# EAGLE board pulser (EAGLE 9.5.1)
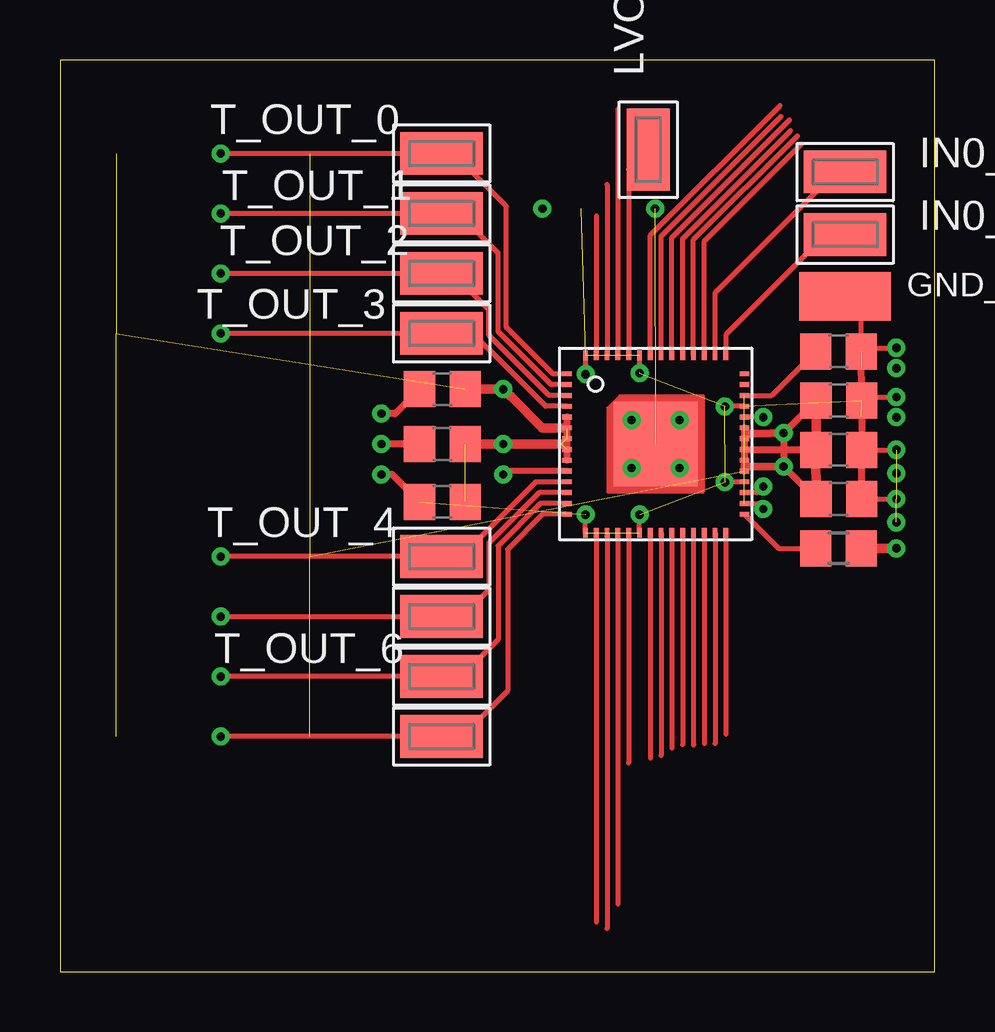
[diagram p0: board, top side]
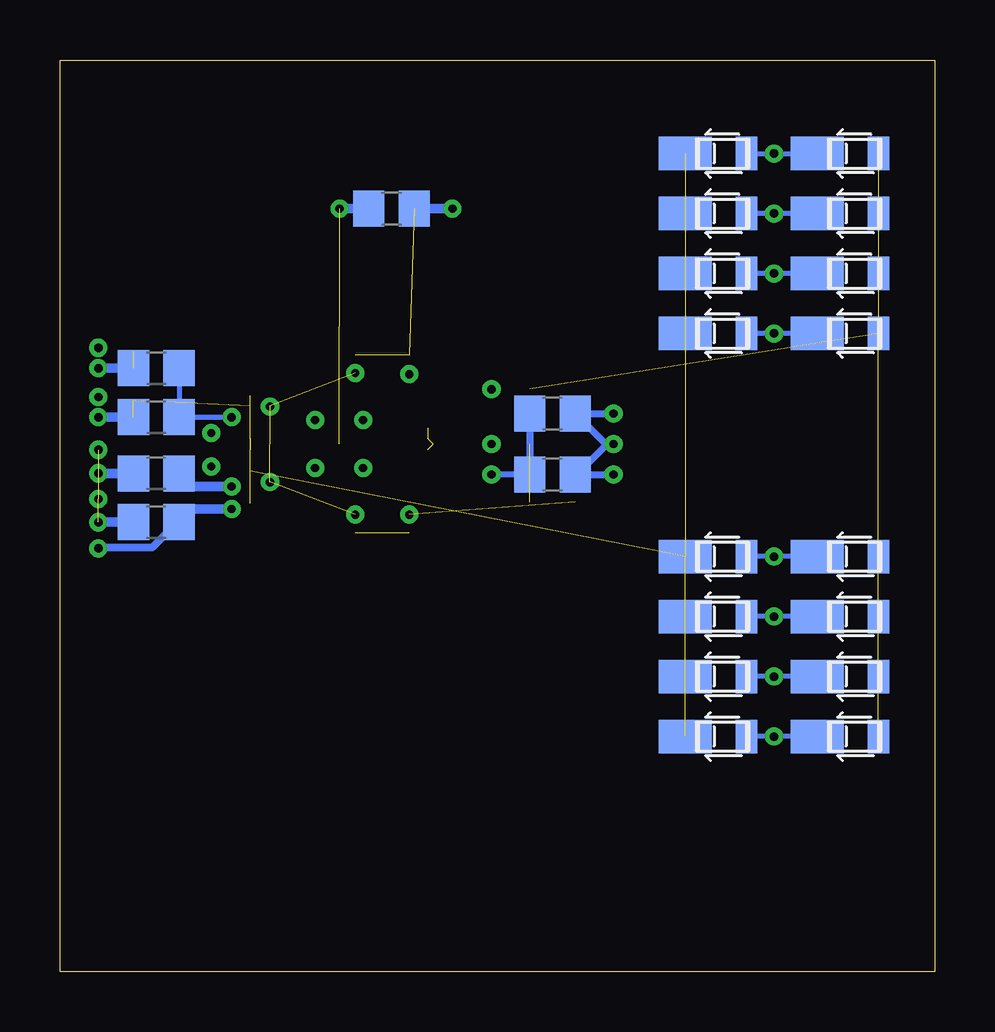
[diagram p1: board, bottom side, seen from below]

Size 36.45 x 38 mm. Coordinates in mm from the lower left corner, seen from the top.
Outline: 0,0 36.45,0 36.45,38 0,38 0,0
Copper layers (1*16): Top 0.035mm / dielectric 0.15mm / Bottom 0.035mm
Design rules "default": minimum track width 6mil, minimum drill 0.35mm, track to track 6mil, track to pad 6mil, pad to pad 6mil, via to via 6mil, smd to smd 6mil, copper to edge 40mil, drill to drill 6mil, minimum pad ring 10mil, minimum via ring 8mil, stop-mask expansion 4mil, vias tented up to drill 0mil, thermal gap 10mil
Net classes: 1 power_cw: width 0.2 mm; 2 power: width 0.3 mm

## Footprints (pad centres in the part's own frame; a part is rotated, then mirrored left to right if it is on the bottom)
C0805 = smd 1.3 x 1.5: 1 -0.95,0; 2 0.95,0
POWERDI-123 = smd 0.9 x 1.4: A -1.6,0 | smd 2.2 x 1.4: C 0.95,0
TP380X203 = smd 3.8 x 2.03: 1 0,0
KEYSTONE_5015 = smd 3.43 x 1.78: 1 0,0
R0805 = smd 1.3 x 1.5: 1 -0.95,0; 2 0.95,0
TFLGA-56LD = smd 0.4 x 0.2: AGND 3.7,-1.575; CK 3.7,2.925; CW 3.7,2.475; DGND 3.7,1.575; DVDD 3.7,2.025; HVM@1 -3.7,1.125; HVM@2 -3.7,0.675; HVM@3 -3.7,0.225; HVM@4 -3.7,-0.225; HVM@5 -3.7,-0.675; HVM_CW -3.7,-1.125; HVP@1 3.7,0.675; HVP@2 3.7,0.225; HVP@3 3.7,-0.225; HVP@4 3.7,-0.675; HVP@5 3.7,-1.125; HVP_CW 3.7,1.125; THSD 3.7,-2.925; VDDM 3.7,-2.025; VDDP 3.7,-2.475; XDCR_1 -3.7,2.925; XDCR_2 -3.7,2.475; XDCR_3 -3.7,2.025; XDCR_4 -3.7,1.575; XDCR_5 -3.7,-1.575; XDCR_6 -3.7,-2.025; XDCR_7 -3.7,-2.475; XDCR_8 -3.7,-2.925 | smd 0.2 x 0.4: GND_PWR@1 -2.925,-3.7; GND_PWR@2 -0.675,-3.7; GND_PWR@3 -0.675,3.7; GND_PWR@4 -2.925,3.7; IN1_0 2.925,3.7; IN1_1 2.475,3.7; IN2_0 2.025,3.7; IN2_1 1.575,3.7; IN3_0 1.125,3.7; IN3_1 0.675,3.7; IN4_0 0.225,3.7; IN4_1 -0.225,3.7; IN5_0 -0.225,-3.7; IN5_1 0.225,-3.7; IN6_0 0.675,-3.7; IN6_1 1.125,-3.7; IN7_0 1.575,-3.7; IN7_1 2.025,-3.7; IN8_0 2.475,-3.7; IN8_1 2.925,-3.7; LVOUT_1 -1.125,3.7; LVOUT_2 -1.575,3.7; LVOUT_3 -2.025,3.7; LVOUT_4 -2.475,3.7; LVOUT_5 -2.475,-3.7; LVOUT_6 -2.025,-3.7; LVOUT_7 -1.575,-3.7; LVOUT_8 -1.125,-3.7 | smd 3.5 x 3.5: SUB 0,0

## Placement (x,y rotation side)
C170  220n 100V  [C0805]  22.64,31.8 0 bottom
C172  220n 100V  [C0805]  32.45,23.8 180 top
C174  220n 100V  [C0805]  32.45,21.75 180 top
C175  220n 100V  [C0805]  32.45,19.7 180 top
C177  220n 100V  [C0805]  32.44,23.11 0 bottom
C178  220n 100V  [C0805]  32.44,25.15 0 bottom
C180  220n 100V  [C0805]  32.44,18.73 180 bottom
C181  220n 100V  [C0805]  32.44,20.77 180 bottom
C182  220n 100V  [C0805]  32.44,25.85 0 top
C183  220n 100V  [C0805]  15.93,24.28 180 top
C184  220n 100V  [C0805]  15.93,21.99 180 top
C185  220n 100V  [C0805]  15.93,19.58 180 top
C190  220n 100V  [C0805]  15.93,20.72 180 bottom
C191  220n 100V  [C0805]  15.93,23.26 180 bottom
D0_0  [POWERDI-123]  9.45,34.1 180 bottom
D0_1  [POWERDI-123]  3.95,34.1 180 bottom
D1_0  [POWERDI-123]  9.45,31.6 180 bottom
D1_1  [POWERDI-123]  3.95,31.6 180 bottom
D2_0  [POWERDI-123]  9.45,29.1 180 bottom
D2_1  [POWERDI-123]  3.95,29.1 180 bottom
D3_0  [POWERDI-123]  9.45,26.6 180 bottom
D3_1  [POWERDI-123]  3.95,26.6 180 bottom
D4_0  [POWERDI-123]  9.45,17.3 180 bottom
D4_1  [POWERDI-123]  3.95,17.3 180 bottom
D5_0  [POWERDI-123]  9.45,14.8 180 bottom
D5_1  [POWERDI-123]  3.95,14.8 180 bottom
D6_0  [POWERDI-123]  9.45,12.3 180 bottom
D6_1  [POWERDI-123]  3.95,12.3 180 bottom
D7_0  [POWERDI-123]  9.45,9.8 180 bottom
D7_1  [POWERDI-123]  3.95,9.8 180 bottom
GND_1  5019  [TP380X203]  32.71,28.15 0 top
IN0_0  5015  [KEYSTONE_5015]  32.71,30.72 0 top
IN0_1  5015  [KEYSTONE_5015]  32.71,33.33 0 top
LVOUT0  5015  [KEYSTONE_5015]  24.51,34.26 90 top
R2  10k  [R0805]  32.44,17.64 0 top
STHV_0  STHV800  [TFLGA-56LD]  24.82,21.99 0 top
T_OUT_0  5015  [KEYSTONE_5015]  15.9,34.1 0 top
T_OUT_1  5015  [KEYSTONE_5015]  15.9,31.6 0 top
T_OUT_2  5015  [KEYSTONE_5015]  15.9,29.1 0 top
T_OUT_3  5015  [KEYSTONE_5015]  15.9,26.6 0 top
T_OUT_4  5015  [KEYSTONE_5015]  15.9,17.3 0 top
T_OUT_5  5015  [KEYSTONE_5015]  15.9,14.8 0 top
T_OUT_6  5015  [KEYSTONE_5015]  15.9,12.3 0 top
T_OUT_7  5015  [KEYSTONE_5015]  15.9,9.8 0 top

## Library data of the parts
C170 C172 C174 C175 C177 C178 C180-C185 C190 C191 = rcl; SPICEPREFIX: C
D0_0 D0_1 D1_0 D1_1 D2_0 D2_1 D3_0 D3_1 D4_0 D4_1 D5_0 D5_1 D6_0 D6_1 D7_0 D7_1 = dfls130l-7; MF: Diodes Inc; MOUSER: SBR1U200P1-7; MPN: SBR1U200P1
GND_1 = 5019; AVAILABILITY: Good; DESCRIPTION: Phosphor Bronze Contact Miniature Silver Plated Surface Mount Test Points; MF: Keystone; MP: 5019; PACKAGE: 2010 Keystone; PRICE: 0.18 USD
IN0_0 IN0_1 LVOUT0 T_OUT_0 T_OUT_1-T_OUT_7 = keystone_5015; AVAILABILITY: Unavailable; DESCRIPTION: Test Point; Black; Surface Mount; Wire Leaded; Polycarbonate; 0.04 in.; MF: Keystone Electronics; MP: 5015; PACKAGE: Keystone Electronics; PRICE: None
R2 = rcl
STHV_0 = wouter

## Nets
CLK: STHV_0.CK
CW: STHV_0.CW
GND [power_cw]: C170.2 C172.1 C174.1 C175.1 C177.1 C178.1 C180.2 C181.2 C182.2 C183.2 C184.2 C185.2 C190.1 C191.1 GND_1.1 STHV_0.AGND STHV_0.DGND STHV_0.GND_PWR@1 STHV_0.GND_PWR@2 STHV_0.GND_PWR@3 STHV_0.GND_PWR@4
HVM [power]: C183.1 C184.1 C185.1 D0_1.A D1_1.A D2_1.A D3_1.A D4_1.A D5_1.A D6_1.A D7_1.A STHV_0.HVM@1 STHV_0.HVM@2 STHV_0.HVM@3 STHV_0.HVM@4 STHV_0.HVM@5
HVM_CW [power_cw]: C190.2 C191.2 STHV_0.HVM_CW
HVP [power]: C172.2 C174.2 C175.2 D0_0.C D1_0.C D2_0.C D3_0.C D4_0.C D5_0.C D6_0.C D7_0.C STHV_0.HVP@1 STHV_0.HVP@2 STHV_0.HVP@3 STHV_0.HVP@4 STHV_0.HVP@5
HVP_CW: C177.2 C178.2 STHV_0.HVP_CW
IN0_0: IN0_0.1 STHV_0.IN1_0
IN0_1: IN0_1.1 STHV_0.IN1_1
IN1_0: STHV_0.IN2_0
IN1_1: STHV_0.IN2_1
IN2_0: STHV_0.IN3_0
IN2_1: STHV_0.IN3_1
IN3_0: STHV_0.IN4_0
IN3_1: STHV_0.IN4_1
IN4_0: STHV_0.IN5_0
IN4_1: STHV_0.IN5_1
IN5_0: STHV_0.IN6_0
IN5_1: STHV_0.IN6_1
IN6_0: STHV_0.IN7_0
IN6_1: STHV_0.IN7_1
IN7_0: STHV_0.IN8_0
IN7_1: STHV_0.IN8_1
LVOUT_0 [low_voltage]: LVOUT0.1 STHV_0.LVOUT_1
LVOUT_1 [low_voltage]: STHV_0.LVOUT_2
LVOUT_2 [low_voltage]: STHV_0.LVOUT_3
LVOUT_3 [low_voltage]: STHV_0.LVOUT_4
LVOUT_4 [low_voltage]: STHV_0.LVOUT_5
LVOUT_5 [low_voltage]: STHV_0.LVOUT_6
LVOUT_6 [low_voltage]: STHV_0.LVOUT_7
LVOUT_7 [low_voltage]: STHV_0.LVOUT_8
N$23: R2.1 STHV_0.THSD
N$24: C170.1 STHV_0.SUB
OUT_0: D0_0.A D0_1.C STHV_0.XDCR_1 T_OUT_0.1
OUT_1: D1_0.A D1_1.C STHV_0.XDCR_2 T_OUT_1.1
OUT_2: D2_0.A D2_1.C STHV_0.XDCR_3 T_OUT_2.1
OUT_3: D3_0.A D3_1.C STHV_0.XDCR_4 T_OUT_3.1
OUT_4: D4_0.A D4_1.C STHV_0.XDCR_5 T_OUT_4.1
OUT_5: D5_0.A D5_1.C STHV_0.XDCR_6 T_OUT_5.1
OUT_6: D6_0.A D6_1.C STHV_0.XDCR_7 T_OUT_6.1
OUT_7: D7_0.A D7_1.C STHV_0.XDCR_8 T_OUT_7.1
VDDM [power_cw]: C181.1 STHV_0.VDDM
VDDP [power_cw]: C180.1 C182.1 R2.2 STHV_0.DVDD STHV_0.VDDP

## Tracks (layer width: path | path; a pad name or v marks a point on that pad's centre or on a via)
GND  (via drill 0.35)  (16 unrouted)
  Top 0.2: C175.1 v34.85,19.7 | C174.1 v34.85,21.75 | C172.1 33.55,23.95 v34.85,23.95 | v34.85,26 33.54,26 C182.2 33.39,27.47 GND_1.1 | STHV_0.GND_PWR@1 v21.89,19.05 v21.9,19.05 | STHV_0.AGND 27.71,20.41 | STHV_0.GND_PWR@2 v24.14,19.05 v24.15,19.05 | STHV_0.DGND 27.71,23.57 | STHV_0.GND_PWR@4 v21.89,24.91 v21.9,24.9 | STHV_0.GND_PWR@3 v24.14,24.95
  Top 0.3: C183.2 13.96,23.26 v13.39,23.26 | C184.2 v13.39,21.99 | C185.2 13.84,20.72 v13.39,20.72 | C175.1 33.39,19.78 C172.1 C182.2
  Top 0.4: 14.91,24.28 C183.2
  Bottom 0.3: v13.39,23.26 C191.1 13.71,21.99 v13.39,21.99 13.64,21.99 14.91,20.72 C190.1 v13.39,20.72
  Bottom 0.4: v34.85,18.73 C180.2 | v34.85,20.77 C181.2 | v34.85,23.11 C177.1 | v34.85,25.15 C178.1 | C170.2 v20.1,31.8
  other vias: 27.7,20.4 27.7,23.55
HVM  (via drill 0.35)  (12 unrouted)
  Top 0.3: STHV_0.HVM@1 21.12,22.05 | 21.12,22.05 STHV_0.HVM@5 | v18.47,21.99 21.06,21.99 21.12,22.05
  Top 0.4: C183.1 v18.47,24.28 18.75,23.99 18.77,23.99 20.1,22.66 STHV_0.HVM@2 | C184.1 v18.47,21.99 20.89,21.99
HVM_CW  (via drill 0.35)
  Top 0.254: STHV_0.HVM_CW 18.61,20.86 v18.47,20.72
  Bottom 0.254: C190.2 v18.47,20.72
  Bottom 0.3: C191.2 C190.2
HVP  (via drill 0.35)  (10 unrouted)
  Top 0.3: STHV_0.HVP@1 STHV_0.HVP@3 | STHV_0.HVP@3 28.52,21.1 | C172.2 v30.15,22.45 v30.15,21.05 C175.2 | C174.2 STHV_0.HVP@3
  Top 0.305: v30.15,22.45 29.61,22.45 29.58,22.43 28.73,22.43 STHV_0.HVP@2 | STHV_0.HVP@5 28.52,21.1 28.57,21.05 v30.15,21.05
  Top 0.4: 31.48,23.8 C172.2 C174.2 C175.2
HVP_CW  (via drill 0.35)
  Top 0.2: v29.3,23.11 STHV_0.HVP_CW
  Top 0.254: v29.3,23.11
  Bottom 0.2: v29.3,23.11 C177.2 C178.2
IN0_0
  Top 0.2: STHV_0.IN1_0 27.75,26.55 31.91,30.72 IN0_0.1
IN0_1
  Top 0.2: STHV_0.IN1_1 27.3,28.3 32.33,33.33 IN0_1.1
IN1_0
  Top 0.2: STHV_0.IN2_0 26.84,30.45 30.9,34.5
IN1_1
  Top 0.2: STHV_0.IN2_1 26.39,30.5 30.72,34.83
IN2_0
  Top 0.2: STHV_0.IN3_0 25.95,30.55 30.45,35.05
IN2_1
  Top 0.2: STHV_0.IN3_1 25.5,30.6 30.4,35.5
IN3_0
  Top 0.2: STHV_0.IN4_0 25.05,30.65 30.05,35.65
IN3_1
  Top 0.2: STHV_0.IN4_1 24.59,30.7 30,36.1
IN4_0
  Top 0.2: STHV_0.IN5_0 24.59,8.9
IN4_1
  Top 0.2: STHV_0.IN5_1 25.05,9.01
IN5_0
  Top 0.2: STHV_0.IN6_0 25.5,9.3
IN5_1
  Top 0.2: STHV_0.IN6_1 25.95,9.46
IN6_0
  Top 0.2: STHV_0.IN7_0 26.39,9.5 26.4,9.5 26.4,9.45
IN6_1
  Top 0.2: STHV_0.IN7_1 26.84,9.49
IN7_0
  Top 0.2: STHV_0.IN8_0 27.3,9.51
IN7_1
  Top 0.2: STHV_0.IN8_1 27.75,9.9
LVOUT_0
  Top 0.2: LVOUT0.1 23.69,33.44 STHV_0.LVOUT_1
LVOUT_1
  Top 0.2: 23.25,35.95 STHV_0.LVOUT_2
LVOUT_2
  Top 0.2: 22.8,32.8 STHV_0.LVOUT_3
LVOUT_3
  Top 0.2: 22.35,31.5 STHV_0.LVOUT_4
LVOUT_4
  Top 0.2: STHV_0.LVOUT_5 22.34,2.06
LVOUT_5
  Top 0.2: STHV_0.LVOUT_6 22.8,1.79
LVOUT_6
  Top 0.2: STHV_0.LVOUT_7 23.25,2.81
LVOUT_7
  Top 0.2: STHV_0.LVOUT_8 23.7,8.7
N$5  (via drill 0.35)
  other vias: 25.82,22.99
N$6  (via drill 0.35)
  other vias: 23.82,22.99
N$7  (via drill 0.35)
  other vias: 23.82,20.99
N$8  (via drill 0.35)
  other vias: 25.82,20.99
N$23
  Top 0.2: STHV_0.THSD 29.95,17.64 R2.1
N$24  (via drill 0.35)  (1 unrouted)
  Bottom 0.4: v24.8,31.8 C170.1
OUT_0  (via drill 0.35)
  Top 0.2: STHV_0.XDCR_1 20.55,24.91 18.6,26.86 18.6,31.9 16.4,34.1 T_OUT_0.1 v6.7,34.1
  Bottom 0.2: D0_0.A v6.7,34.1 D0_1.C
OUT_1  (via drill 0.35)
  Top 0.2: STHV_0.XDCR_2 20.47,24.46 18.25,26.69 18.25,29.95 16.6,31.6 T_OUT_1.1 v6.7,31.6
  Bottom 0.2: D1_1.C v6.7,31.6 D1_0.A
OUT_2  (via drill 0.35)
  Top 0.2: STHV_0.XDCR_3 20.39,24.02 17.87,26.53 17.87,27.59 16.9,28.56 16.9,29.25 16.05,29.25 T_OUT_2.1 v6.7,29.1
  Bottom 0.2: D2_1.C v6.7,29.1 D2_0.A
OUT_3  (via drill 0.35)
  Top 0.2: STHV_0.XDCR_4 20.23,23.57 18.4,25.4 17.2,26.6 T_OUT_3.1 v6.7,26.6
  Bottom 0.2: D3_1.C v6.7,26.6 D3_0.A
OUT_4  (via drill 0.35)
  Top 0.2: STHV_0.XDCR_5 19.83,20.41 16.72,17.3 T_OUT_4.1 v6.7,17.3
  Bottom 0.2: D4_1.C v6.7,17.3 D4_0.A
OUT_5  (via drill 0.35)
  Top 0.2: STHV_0.XDCR_6 19.96,19.96 17.87,17.87 17.87,15.9 16.76,14.8 T_OUT_5.1 v6.7,14.8
  Bottom 0.2: D5_1.C v6.7,14.8 D5_0.A
OUT_6  (via drill 0.35)
  Top 0.2: STHV_0.XDCR_7 20.02,19.52 18.25,17.75 18.25,13.84 16.71,12.3 T_OUT_6.1 v6.7,12.3
  Bottom 0.2: D6_1.C v6.7,12.3 D6_0.A
OUT_7  (via drill 0.35)
  Top 0.2: STHV_0.XDCR_8 20.11,19.07 18.65,17.6 18.65,11.7 16.75,9.8 T_OUT_7.1 v6.7,9.8
  Bottom 0.2: D7_1.C v6.7,9.8 D7_0.A
VDDM  (via drill 0.35)
  Top 0.2: v29.3,20.22 29.05,19.96 STHV_0.VDDM
  Bottom 0.4: v29.3,20.22 30.94,20.22 C181.1
VDDP  (via drill 0.35)  (1 unrouted)
  Top 0.2: STHV_0.VDDP 29.2,19.52 29.3,19.41 v29.3,19.28 | 31.17,25.85 C182.1 29.66,24.02 STHV_0.DVDD
  Top 0.3: C182.1 31.49,26.17
  Top 0.4: R2.2 v34.85,17.64
  Bottom 0.305: v29.3,19.28 31.01,19.28 32.61,17.68 34.81,17.68 v34.85,17.64
  Bottom 0.4: v29.3,19.28 30.94,19.28 C180.1